# EAGLE board megashield_rs485 (EAGLE 7.6.0)
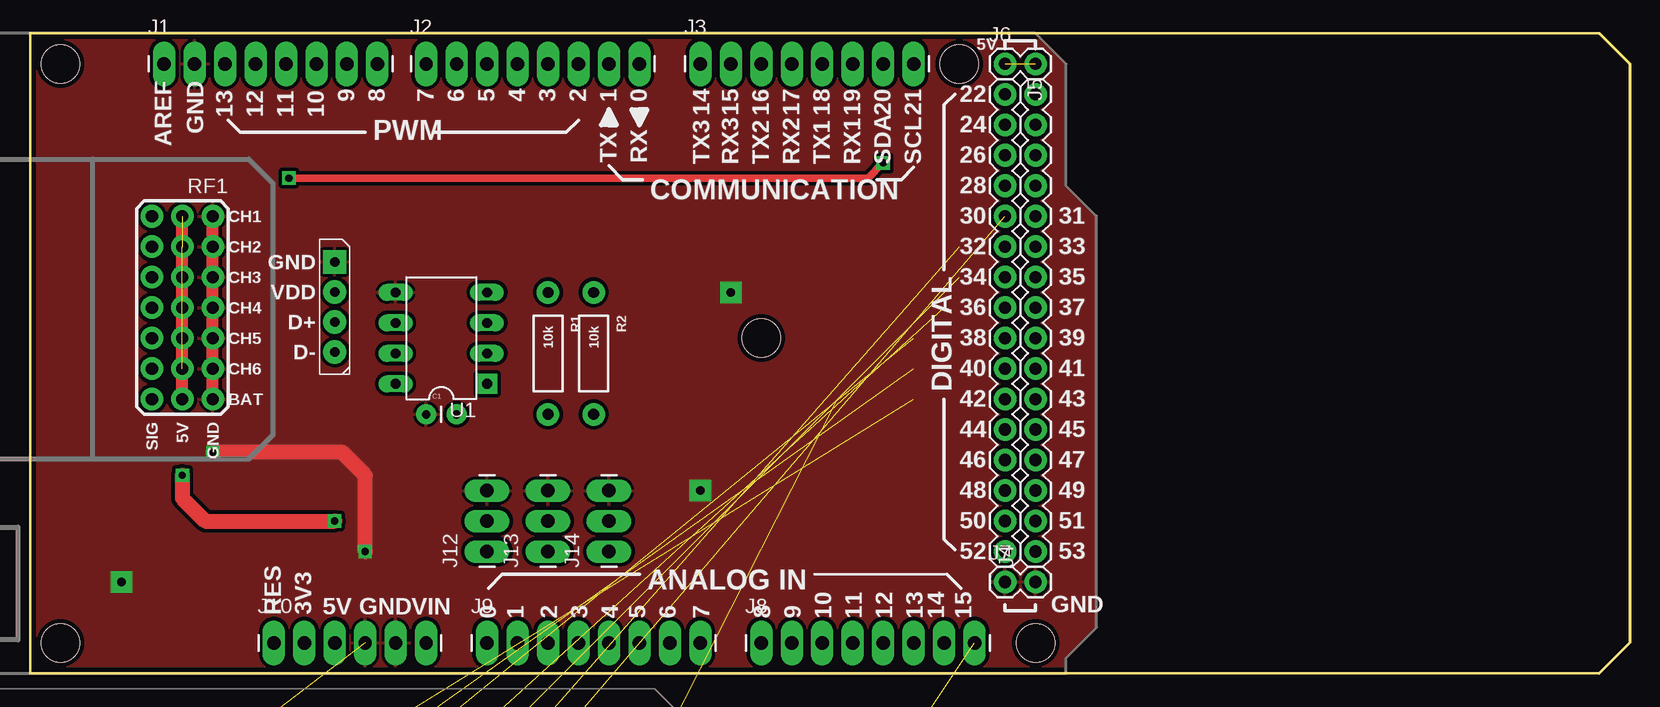
[diagram p0: board, top side]
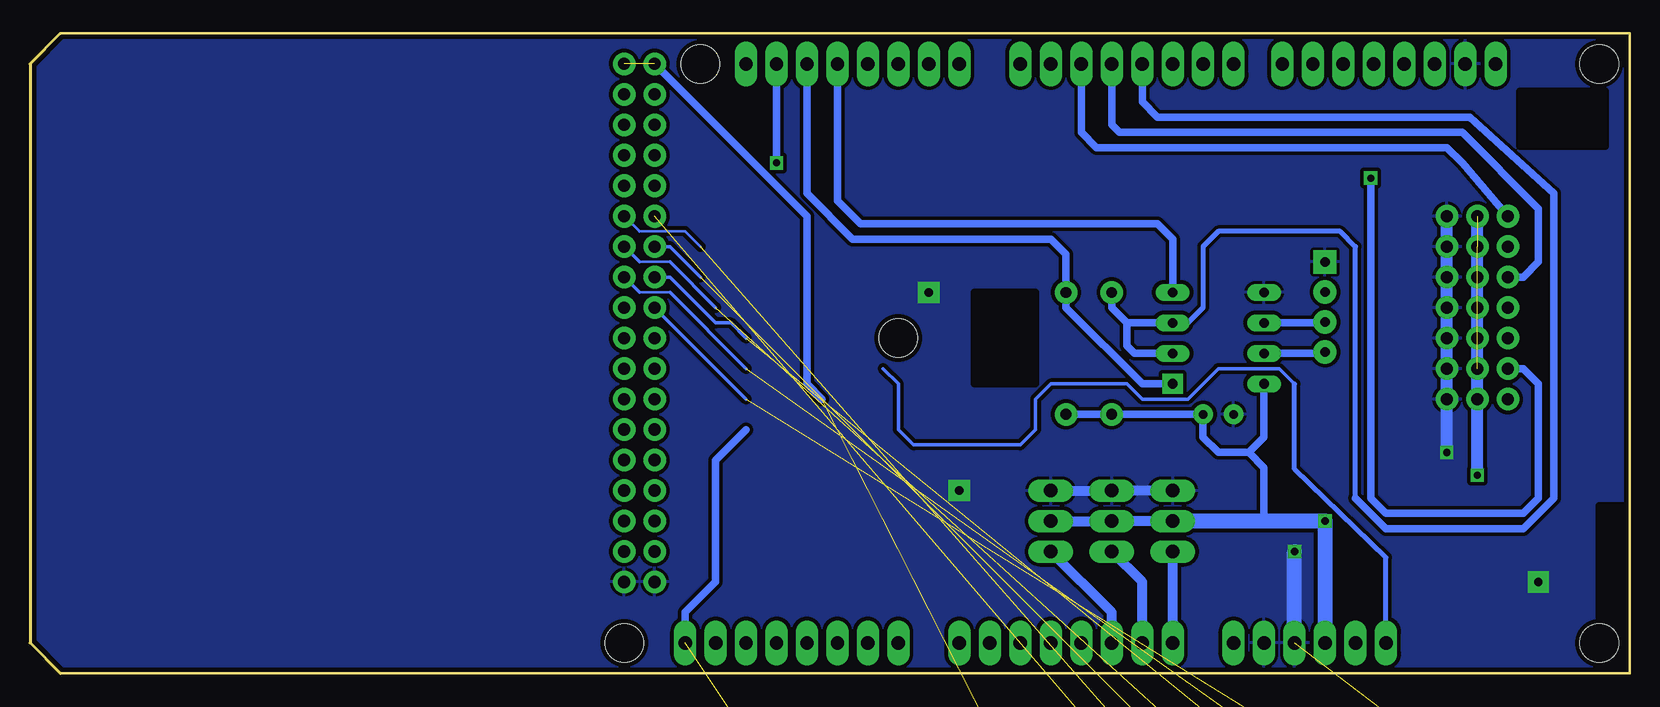
[diagram p1: board, bottom side, seen from below]

Size 133.35 x 53.34 mm. Coordinates in mm from the lower left corner, seen from the top.
Outline: 0,0 130.81,0 133.35,2.54 133.35,50.8 130.81,53.34 0,53.34 0,0
Copper layers (1*16): Top 0.035mm / dielectric 1.5mm / Bottom 0.035mm
Design rules "config_through_hole": minimum track width 8mil, minimum drill 20mil, track to track 9mil, track to pad 9mil, pad to pad 9mil, via to via 9mil, smd to smd 8mil, copper to edge 15mil, drill to drill 8mil, minimum pad ring 12mil, minimum via ring 10mil, stop-mask expansion 4mil, vias tented up to drill 25mil, thermal gap 10mil
Holes 3.2 mm at 2.54,50.8 2.54,2.54 77.47,50.8 83.82,2.54 60.96,27.94
bRestrict: area 49.5,24.1 to 54.6,31.8; area 2,43.9 to 9.1,48.5; area -12.7,30.5 to -1.3,53.3; area -12.7,0 to 2.5,14

## Footprints (pad centres in the part's own frame; a part is rotated, then mirrored left to right if it is on the bottom)
CAP-PTH-SMALL = drill 0.7 pad 1.651: 1 0,0; 2 2.54,0
1X08_LONGPADS = drill 1.118 pad 1.88 long: 1 0,0; 2 2.54,0; 3 5.08,0; 4 7.62,0; 5 10.16,0; 6 12.7,0; 7 15.24,0; 8 17.78,0
1X16 = drill 1.016 pad 1.88: 1 0,0; 2 2.54,0; 3 5.08,0; 4 7.62,0; 5 10.16,0; 6 12.7,0; 7 15.24,0; 8 17.78,0; 9 20.32,0; 10 22.86,0; 11 25.4,0; 12 27.94,0; 13 30.48,0; 14 33.02,0; 15 35.56,0; 16 38.1,0
1X02 = drill 1.016 pad 1.88: 1 0,0; 2 2.54,0
1X06_LONGPADS = drill 1.118 pad 1.88 long: 1 0,0; 2 2.54,0; 3 5.08,0; 4 7.62,0; 5 10.16,0; 6 12.7,0
DYNAMIXEL_SPOX_04 = drill 0.8 pad 1.93 square: 1 0,0 | drill 0.8 pad 1.93: 2 2.5,0; 3 5,0; 4 7.5,0
1X03_LONGPADS = drill 1.118 pad 1.88 long: 1 0,0; 2 2.54,0; 3 5.08,0
LCD_SHIELD = drill 1 pad 1.676 long: 5V 52.07,5.08; BLC 50.546,53.34; BS 64.77,5.08; D4 67.31,53.34; D5 64.77,53.34; D6 62.23,53.34; D7 59.69,53.34; EN 53.086,53.34; GND@1 57.15,5.08; GND@2 54.61,5.08; GND@3 40.386,53.34; NC@1 37.846,53.34; NC@2 42.926,53.34; NC@3 45.466,53.34; NC@4 48.006,53.34; NC@5 69.85,53.34; NC@6 72.39,53.34; NC@7 74.93,53.34; NC@8 77.47,53.34; NC@9 46.99,5.08; NC@10 49.53,5.08; NC@11 59.69,5.08; NC@12 67.31,5.08; NC@13 69.85,5.08; NC@14 72.39,5.08; NC@15 74.93,5.08; NC@16 77.47,5.08; RS 55.626,53.34
AXIAL-0.4 = drill 0.9 pad 1.88: P$1 -5.08,0; P$2 5.08,0
FS_R6B = drill 1.016 pad 1.88: CH1 5.08,-15.24; CH2 5.08,-12.7; CH3 5.08,-10.16; CH4 5.08,-7.62; CH5 5.08,-5.08; CH6 5.08,-2.54; GND@1 0,0; GND@2 0,-2.54; GND@3 0,-5.08; GND@4 0,-7.62; GND@5 0,-10.16; GND@6 0,-12.7; GND@7 0,-15.24; NC 5.08,0; VCC@1 2.54,0; VCC@2 2.54,-2.54; VCC@3 2.54,-5.08; VCC@4 2.54,-7.62; VCC@5 2.54,-10.16; VCC@6 2.54,-12.7; VCC@7 2.54,-15.24
DIL08 = drill 0.813 pad 1.676 square: 1 -3.81,-3.81 | drill 0.813 long: 2 -1.27,-3.81; 3 1.27,-3.81; 4 3.81,-3.81; 5 3.81,3.81; 6 1.27,3.81; 7 -1.27,3.81; 8 -3.81,3.81

## Placement (x,y rotation side)
C1  0.1u  [CAP-PTH-SMALL]  33.02,21.59 0 top
J1  [1X08_LONGPADS]  11.18,50.8 0 top
J2  [1X08_LONGPADS]  33.02,50.8 0 top
J3  [1X08_LONGPADS]  55.88,50.8 0 top
J4  [1X16]  83.82,10.16 90 top
J5  [1X16]  81.28,48.26 270 top
J6  [1X02]  81.28,50.8 0 top
J7  [1X02]  81.28,7.62 0 top
J8  [1X08_LONGPADS]  60.96,2.54 0 top
J9  [1X08_LONGPADS]  38.1,2.54 0 top
J10  [1X06_LONGPADS]  20.32,2.54 0 top
J11  DYNAMIXEL_RS485  [DYNAMIXEL_SPOX_04]  25.4,34.29 270 top
J12  [1X03_LONGPADS]  38.1,10.16 90 top
J13  [1X03_LONGPADS]  43.18,10.16 90 top
J14  [1X03_LONGPADS]  48.26,10.16 90 top
LCD  LCD_SHIELD  [LCD_SHIELD]  -24.13,-59.69 0 top  (outside the outline)
R1  10k  [AXIAL-0.4]  43.18,26.67 270 top
R2  10k  [AXIAL-0.4]  46.99,26.67 270 top
RF1  FS_R6B  [FS_R6B]  15.24,22.86 180 top
U1  RS485  [DIL08]  34.29,27.94 90 top

## Library data of the parts
C1 J1-J14 LCD R1 R2 RF1 U1 = mecatronica_eagle_lib

## Nets
3.3: J10.2
5V: C1.2 J10.3 J12.2 J13.2 J14.2 R1.P$2 R2.P$2 RF1.VCC@1 RF1.VCC@2 RF1.VCC@3 RF1.VCC@4 RF1.VCC@5 RF1.VCC@6 RF1.VCC@7 U1.8
5V@1: J6.1 J6.2 LCD.5V
A0: J9.1 J12.1
A1: J9.2 J13.1
A2: J9.3 J14.1
A3: J9.4
A4: J9.5
A5: J9.6
A6: J9.7
A7: J9.8
A8: J8.1
A9: J8.2
A10: J8.3
A11: J8.4
A12: J8.5
A13: J8.6
A14: J8.7
A15: J8.8 LCD.BS
AREF: J1.1
D2: J2.6 RF1.CH1
D3: J2.5 RF1.CH3
D4: J2.4 R1.P$1 U1.2 U1.3
D5: J2.3
D6: J2.2
D7: J2.1
D8: J1.8
D9: J1.7
D10: J1.6
D11: J1.5
D12: J1.4
D13: J1.3
D20: J3.7 RF1.CH6
D21: J3.8
D22: J5.1
D23: J4.16
D24: J5.2
D25: J4.15
D26: J5.3
D27: J4.14
D28: J5.4
D29: J4.13
D30: J5.5 LCD.D4
D31: J4.12 LCD.D5
D32: J5.6 LCD.D6
D33: J4.11 LCD.D7
D34: J5.7 LCD.RS
D35: J4.10 LCD.EN
D36: J5.8 LCD.BLC
D37: J4.9
D38: J5.9
D39: J4.8
D40: J5.10
D41: J4.7
D42: J5.11
D43: J4.6
D44: J5.12
D45: J4.5
D46: J5.13
D47: J4.4
D48: J5.14
D49: J4.3
D50: J5.15
D51: J4.2
D52: J5.16
D53: J4.1
GND: C1.1 J1.2 J7.1 J7.2 J10.4 J10.5 J11.1 J12.3 J13.3 J14.3 LCD.GND@1 LCD.GND@2 LCD.GND@3 RF1.GND@1 RF1.GND@2 RF1.GND@3 RF1.GND@4 RF1.GND@5 RF1.GND@6 RF1.GND@7 U1.5
N$1: J11.3 U1.6
N$2: J11.4 U1.7
N$4: RF1.CH2
N$6: RF1.CH4
N$7: RF1.CH5
RES: J10.1
RX0: J2.8
RX1: J3.6 R2.P$1 U1.1
RX2: J3.4
RX3: J3.2
TX0: J2.7
TX1: J3.5 U1.4
TX2: J3.3
TX3: J3.1
VDD: J11.2
VIN: J10.6

## Tracks (layer width: path | path; a pad name or v marks a point on that pad's centre or on a via)
5V  (via drill 0.6)  (5 unrouted)
  Top 1.27: v12.7,16.51 12.7,14.61 14.61,12.7 v25.4,12.7
  Bottom 0.61: R2.P$2 R1.P$2 C1.2 35.56,19.68 34.29,18.41 31.75,18.41 | 31.75,18.41 30.48,17.14 30.48,12.7 | U1.8 30.48,19.68 31.75,18.41
  Bottom 0.813: J14.2 J13.2 J12.2
  Bottom 1.016: v12.7,16.51 RF1.VCC@1
  Bottom 1.27: J12.2 30.48,12.7 v25.4,12.7 J10.3
5V@1  (2 unrouted)
  Bottom 0.61: J6.1 68.58,38.1 68.58,24.13 67.31,22.86
A0
  Bottom 0.813: J9.1 J12.1
A1
  Bottom 0.813: J9.2 40.64,7.62 J13.1
A2
  Bottom 0.813: J9.3 43.18,5.08 J14.1
A15  (1 unrouted)
  Bottom 0.61: 73.66,20.32 76.2,17.78 76.2,7.62 78.74,5.08 J8.8
D2
  Bottom 0.61: J2.6 45.72,45.09 44.45,43.81 15.24,43.81 13.97,42.55 RF1.CH1
D3
  Bottom 0.61: J2.5 43.18,45.72 42.55,45.09 13.97,45.09 7.62,38.73 7.62,34.29 8.89,33.02 RF1.CH3
D4
  Bottom 0.305: 36.83,29.21 U1.3
  Bottom 0.406: 22.86,14.61 22.86,35.56 24.13,36.83 34.29,36.83 35.56,35.56 35.56,30.48 36.83,29.21
  Bottom 0.61: J2.4 40.64,47.62 39.37,46.35 13.34,46.35 6.35,40.01 6.35,14.61 8.89,12.06 20.32,12.06 22.86,14.61 | U1.3 41.91,29.21 | 41.91,29.21 43.18,30.48 R1.P$1 | U1.2 41.28,26.67 41.91,27.3 41.91,29.21
D20  (via drill 0.6)
  Top 0.61: v21.59,41.27 69.85,41.27 v71.12,42.55
  Bottom 0.61: v71.12,42.55 J3.7 | RF1.CH6 8.89,25.4 7.62,24.13 7.62,14.61 8.89,13.34 20.32,13.34 21.59,14.61 v21.59,41.27
D30  (1 unrouted)
D31  (1 unrouted)
  Bottom 0.203: 78.74,36.83 82.55,36.83
  Bottom 0.254: 77.47,35.56 78.74,36.83 | 82.55,36.83 J4.12
D32  (1 unrouted)
  Bottom 0.305: 77.47,33.02 80.01,35.56 J5.6
D33  (1 unrouted)
  Bottom 0.203: 80.01,34.29 82.55,34.29
  Bottom 0.305: 76.2,30.48 80.01,34.29 | 82.55,34.29 J4.11
D34  (1 unrouted)
  Bottom 0.305: 73.66,27.94 74.93,29.21 76.2,29.21 80.01,33.02 J5.7
D35  (1 unrouted)
  Bottom 0.203: 80.01,31.75 82.55,31.75
  Bottom 0.305: 73.66,25.4 80.01,31.75 | 82.55,31.75 J4.10
D36  (1 unrouted)
  Bottom 0.305: 73.66,22.86 J5.8
GND  (via drill 0.6, 0.7 pad 1.78)  (3 unrouted)
  Top 1.27: v27.94,10.16 27.94,16.51 26.04,18.41 v15.24,18.41
  Bottom 0.813: J12.3 J13.3 J14.3
  Bottom 1.016: v15.24,18.41 RF1.GND@1
  Bottom 1.27: J10.4 v27.94,10.16
  other vias: 7.62,7.62 55.88,15.24 58.42,31.75
  pour Bottom (isolate 0.305): -12.7,0 130.81,0 133.35,2.54 133.35,50.8 130.81,53.34 -12.7,53.34
  pour Top (isolate 0.305): -12.7,0 86.36,0 86.36,1.27 88.9,3.81 88.9,38.1 86.36,40.64 86.36,50.8 83.82,53.34 -12.7,53.34 -12.7,2.54
N$1
  Bottom 0.61: U1.6 25.48,29.21 J11.3
N$2
  Bottom 0.61: U1.7 25.52,26.67 J11.4
RES
  Bottom 0.305: 27.94,24.13 29.21,25.4 34.29,25.4 36.83,22.86 40.64,22.86 41.91,24.13 48.26,24.13 49.53,22.86 49.53,20.32 50.8,19.05 59.69,19.05 60.96,20.32 60.96,24.13 62.23,25.4
  Bottom 0.406: J10.1 20.32,9.65 27.94,17.02 27.94,24.13
RX1
  Bottom 0.61: U1.1 40.64,24.13 46.99,30.48 R2.P$1 46.99,34.92 48.26,36.2 64.77,36.2 68.58,40.01 J3.6
TX1
  Bottom 0.61: U1.4 38.1,36.2 39.37,37.47 64.13,37.47 66.04,39.37 J3.5

## Text on the board
tPlace: 5V | 9 | 8 | 7 | 6 | 5 | 4 | 3 | 2 | 1 | 0 | 22 | 13 | 12 | 11 | 10 | 14 | 15 | 16 | 17 | 18 | 19 | 20 | 21 | GND | 24 | AREF | PWM | TX | RX | 26 | TX3 | RX3 | TX2 | RX2 | TX1 | RX1 | SDA | SCL | 28 | COMMUNICATION | 30 | 31 | 32 | 33 | 34 | 35 | 36 | 37 | 38 | 39 | 40 | 41 | DIGITAL | 42 | 43 | 44 | 45 | 46 | 47 | 48 | 49 | 50 | 51 | 52 | 53 | ANALOG IN | RES | 3V3 | 5V | GND | VIN | 0 | 1 | 2 | 3 | 4 | 5 | 6 | 7 | 8 | 9 | 10 | 11 | 12 | 13 | 14 | 15 | GND
tDocu: USB | PWR